# EAGLE board neato (EAGLE 7.5.0)
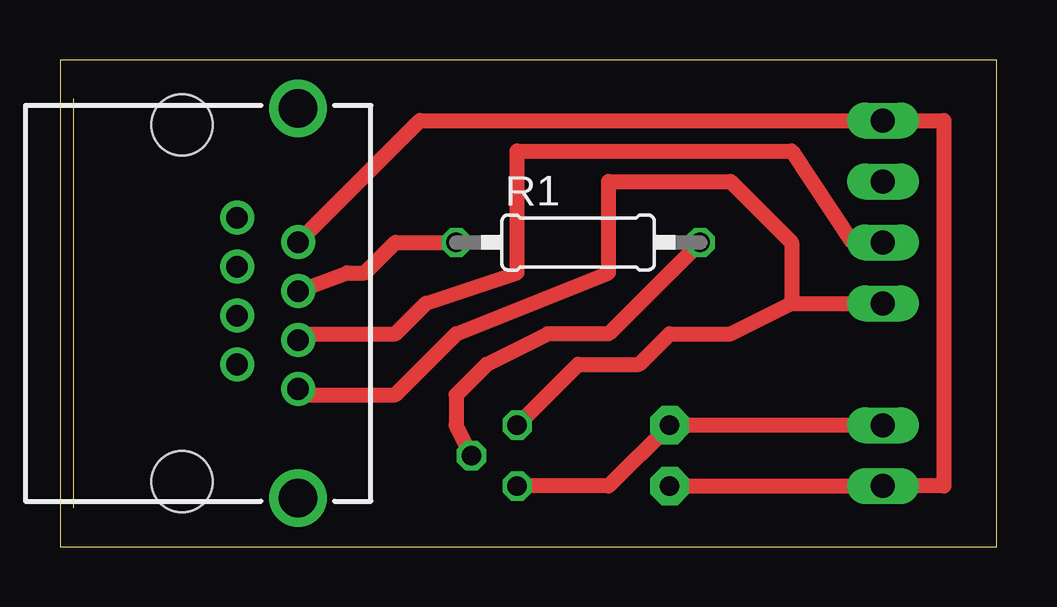
[diagram p0: board, top side]
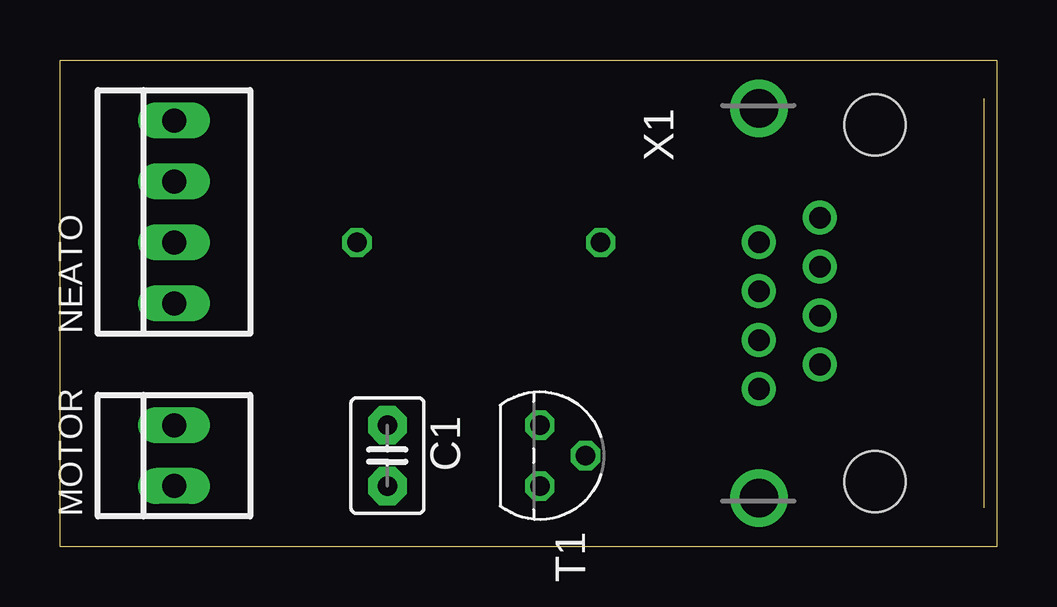
[diagram p1: board, bottom side, seen from below]

Size 39.04 x 20.31 mm. Coordinates in mm from the lower left corner, seen from the top.
Outline: 0,0 39.04,0 39.04,20.31 0,20.31 0,0
Copper layers 1: Top 0.0356mm
Design rules "LawlorPCB": minimum track width 25mil, minimum drill 13mil, track to track 25mil, track to pad 25mil, pad to pad 10mil, via to via 10mil, smd to smd 10mil, copper to edge 15mil, drill to drill 15mil, minimum pad ring 7mil, minimum via ring 7mil, stop-mask expansion 3mil, vias tented up to drill 0mil, thermal gap 10mil
Net classes: 0 default: clearance 0.205 mm

## Footprints (pad centres in the part's own frame; a part is rotated, then mirrored left to right if it is on the bottom)
C2.5-3 = drill 0.813 pad 1.6 octagon: 1 -1.27,0; 2 1.27,0
22-23-2021 = drill 1 long: 1 -1.27,0; 2 1.27,0
22-23-2041 = drill 1 long: 1 -3.81,0; 2 -1.27,0; 3 1.27,0; 4 3.81,0
0207/10 = drill 0.813 octagon: 1 -5.08,0; 2 5.08,0
TO92 = drill 0.813 octagon: 1 1.27,0; 2 0,1.905; 3 -1.27,0
GLX-S-88M = drill 0.9 pad 1.422: 1 -3.57,-2.3; 2 -2.55,-4.84; 3 -1.53,-2.3; 4 -0.51,-4.84; 5 0.51,-2.3; 6 1.53,-4.84; 7 2.55,-2.3; 8 3.57,-4.84 | drill 1.6 pad 2.184: S1 -8.125,-4.84; S2 8.125,-4.84 | hole 2.55: -7.44,0; 7.44,0

## Placement (x,y rotation side)
C1  [C2.5-3]  25.4,3.81 270 bottom
MOTOR  22-23-2021  [22-23-2021]  34.29,3.81 90 bottom
NEATO  22-23-2041  [22-23-2041]  34.29,13.97 90 bottom
R1  [0207/10]  21.59,12.7 0 top
T1  2N3904  [TO92]  19.05,3.81 270 bottom
X1  GLX-S-88M  [GLX-S-88M]  5.08,10.16 270 bottom

## Library data of the parts
C1 = capacitor-wima
MOTOR = con-molex; MF: MOLEX; MPN: 22-23-2021; OC_FARNELL: 1462926; OC_NEWARK: 25C3832
NEATO = con-molex; MF: MOLEX; MPN: 22-23-2041; OC_FARNELL: 1462920; OC_NEWARK: 38C0355
R1 = eagle-ltspice; SPICEMODEL: NONE; SPICEPREFIX: R
T1 = transistor
X1 = con-kycon; OC_FARNELL: unknown; OC_NEWARK: unknown

## Nets
GND: NEATO.1 T1.3 X1.8
N$2: C1.1 MOTOR.2 T1.1
N$3: R1.1 X1.4
N$5: NEATO.2 X1.6
N$6: R1.2 T1.2
PWR: C1.2 MOTOR.1 NEATO.4 X1.2

## Tracks (layer width: path | path; a pad name or v marks a point on that pad's centre or on a via)
GND
  Top 0.635: T1.3 21.59,7.62 24.13,7.62 25.4,8.89 27.94,8.89 30.48,10.16 | 30.48,10.16 NEATO.1 | X1.8 10.16,6.35 13.97,6.35 16.51,8.89 22.86,11.43 22.86,15.24 27.94,15.24 30.48,12.7 30.48,10.16
N$2
  Top 0.635: MOTOR.2 C1.1 22.86,2.54 T1.1
N$3
  Top 0.635: X1.4 11.95,11.43 12.7,11.43 13.97,12.7 R1.1
N$5
  Top 0.635: X1.6 10.18,8.89 13.97,8.89 15.24,10.16 19.05,11.43 19.05,16.51 30.48,16.51 33.02,12.7 NEATO.2
N$6
  Top 0.635: R1.2 22.86,8.89 20.32,8.89 17.78,7.62 16.51,6.35 16.51,5.08 T1.2
PWR
  Top 0.635: C1.2 MOTOR.1 36.83,2.54 36.83,17.78 NEATO.4 14.99,17.78 X1.2